# Altium PCB Ver4(AD).PcbDoc
Units mil, origin at the board's own origin, x right, y up, seen from the top; angles counter-clockwise.
Board outline 1574.8 x 1574.8 mil, 2 copper layers (Top Layer, Bottom Layer); 33 components, 29 nets, 198 pads, 51 vias.
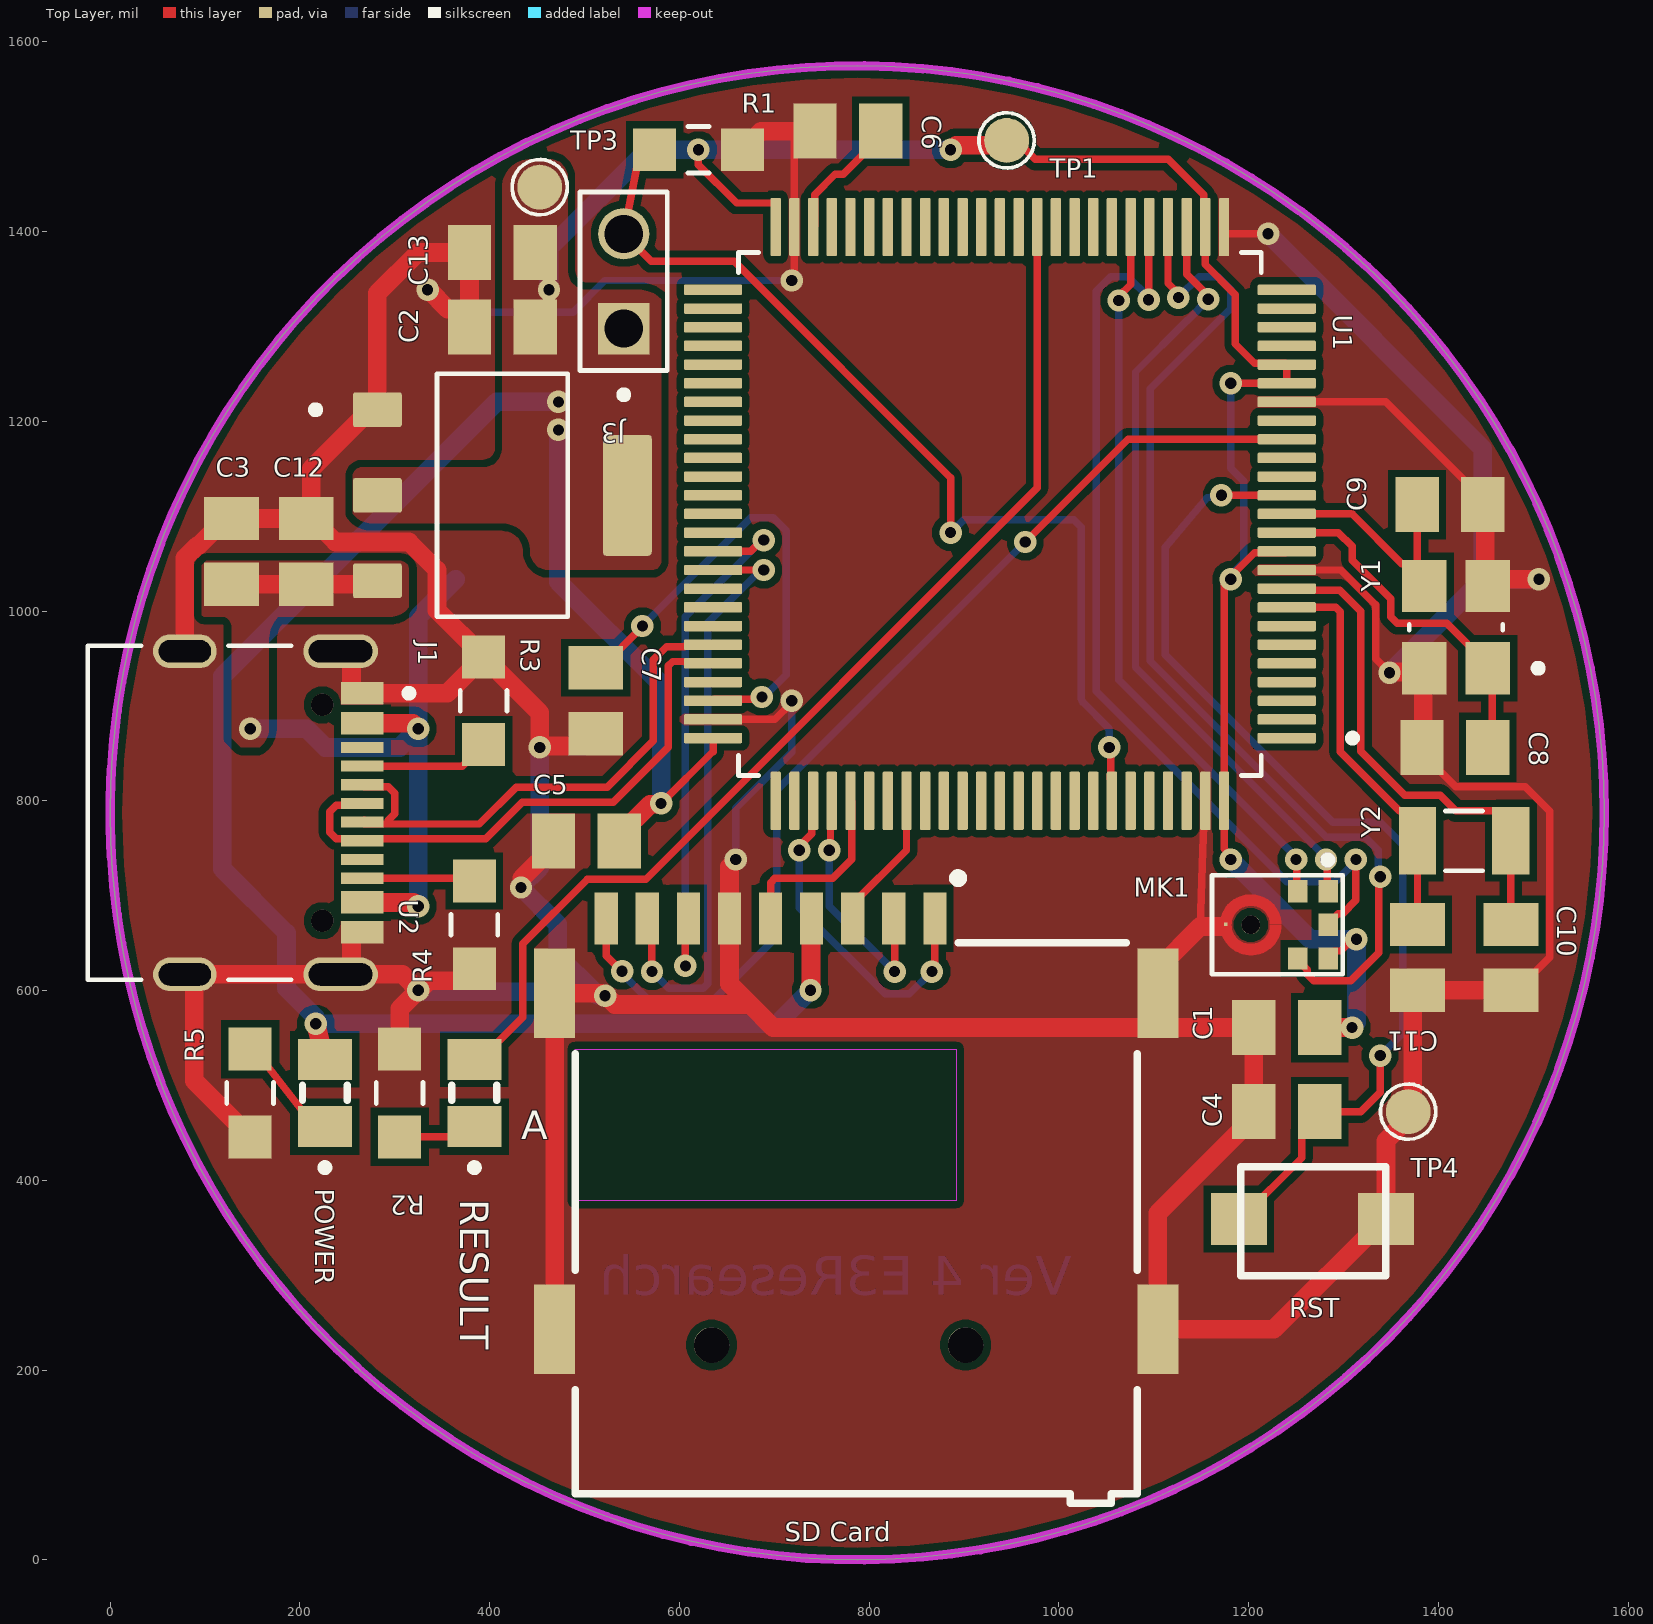
[diagram p0: Top Layer view]
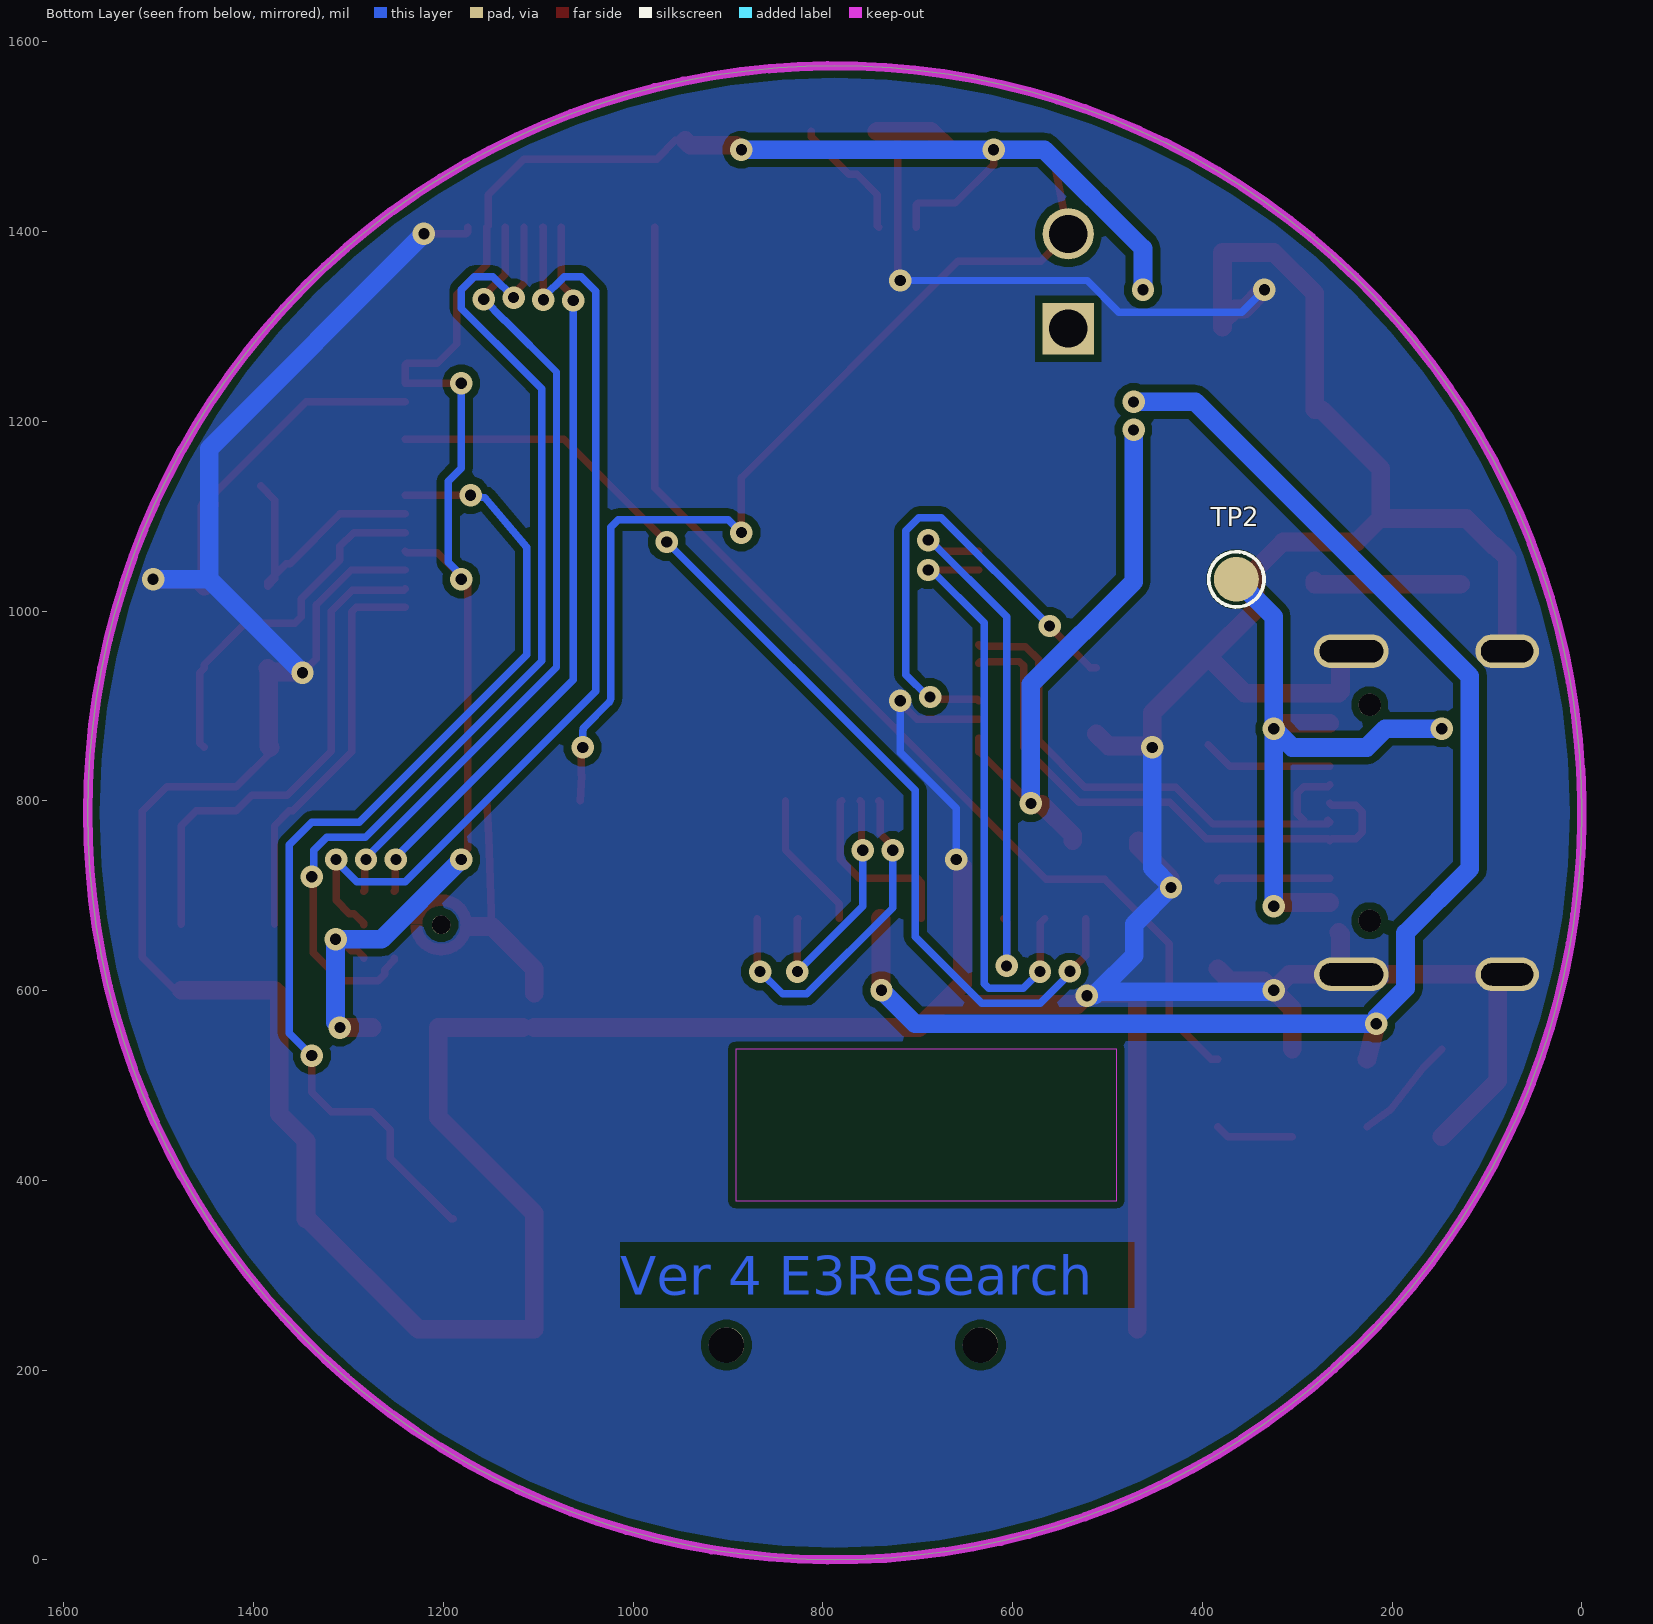
[diagram p1: Bottom Layer view, seen from below]
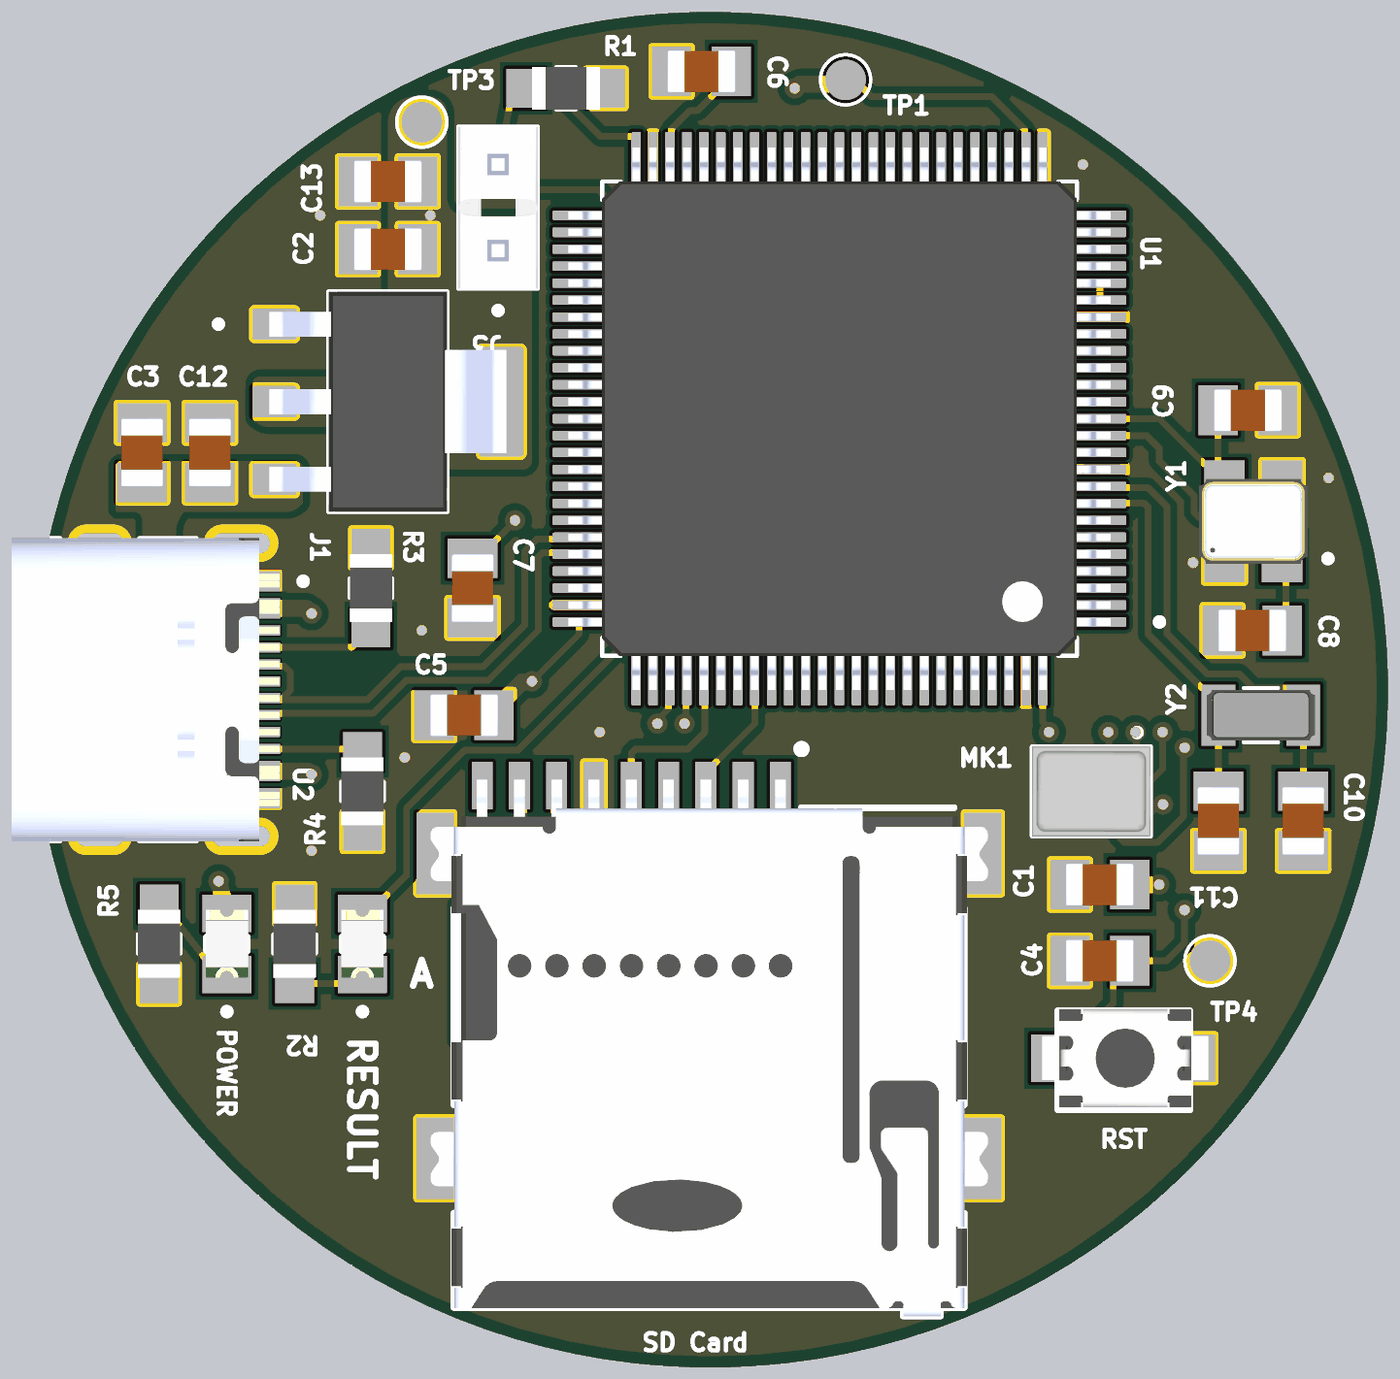
[diagram p2: 3D render of the assembled board from above, using the file's embedded part models]

## Layer stack, top to bottom
Top Solder: solder mask 0.4, Solder Resist, Dk 3.5
Top Layer: signal copper 1.4
Dielectric 1: dielectric 12.6, FR-4, Dk 4.8
Bottom Layer: signal copper 1.4
Bottom Solder: solder mask 0.4, Solder Resist, Dk 3.5

## Board outline
787.4,0 cw(c787.4,787.4) 0,787.4 cw(c787.4,787.4) 787.4,1574.8 cw(c787.4,787.4) 1574.8,787.4 cw(c787.4,787.4)

## Design rules (kind name [scope] priority, off if disabled: settings)
Clearance Clearance_1 [All] p1: gap=7.87 ignorepadtopadclearanceinfootprint=FALSE except(0: Fill-Text Poly-Text Region-Text)
Clearance Test [IsBold] p2: gap=0 ignorepadtopadclearanceinfootprint=TRUE
DiffPairsRouting [All] p1: maxlimit=10 minlimit=7.87 mostfreqgap=7.87 toplayer_minwidth=7.87 toplayer_maxwidth=7.87 toplayer_prefwidth=7.87 bottomlayer_minwidth=7.87 bottomlayer_maxwidth=7.87 bottomlayer_prefwidth=7.87 maxuncoupledlength=500
PolygonConnect [All] p1: connectstyle=Direct reliefconductorwidth=10 reliefentries=4 polygonreliefangle="90 Angle" airgapwidth=10
RoutingVias [All] p1: holewidth=11.81 width=23.62 viastyle="Through Hole" minholewidth=11.81 minwidth=23.62 maxholewidth=11.81 maxwidth=23.62
SMDNeckDown UI [IsPad and IsComponentPad and InComponent('U1')] p1: percent=80.000
SolderMaskExpansion Via [IsVia] p1: expansion=4 istentingtop=TRUE
SolderMaskExpansion SolderMaskExpansion_1 [All] p2: expansion=4 istentingtop=FALSE
SupplyNets "Schematic Supply Nets_2" [InNet('GND')] p1: voltage=0.000
SupplyNets "Schematic Supply Nets_1" [InNet('+3.3V')] p2: voltage=0.000
SupplyNets "Schematic Supply Nets" [InNet('+5V')] p3: voltage=0.000
Width Width_Power [InNet('GND') or InNet('+5V') or InNet('+3.3V') or InNet('VBUS')] p1: maxlimit=19.68 minlimit=7.87 preferedwidth=7.87
Width [All] p2: maxlimit=7.87 minlimit=7.87 preferedwidth=7.87
29 further rules are at their usual default settings.

## Classes and differential pairs
differential pair USB: +USB_P -USB_N

## Components (designator, comment, footprint, x,y, rotation, side; value= is the part's Value field where it differs from the comment)
C1 "0.1uF" CAPC2012X94N 1240.16,561.02 r180 top
C2 "10 µF" CAPC2012X94N 413.39,1377.95 r180 top
C3 "10 µF" CAPC2012X94N 127.95,1062.99 r90 top
C4 "0.1 µF" CAPC2012X94N 1240.16,472.44 r180 top
C5 "0.1uF" CAPC2012X94N 501.97,757.87 r180 top
C6 "2.2uF" CAPC2012X94N 777.56,1505.91 r0 top
C7 "2.2uF" CAPC2012X94N 511.81,905.51 r90 top
C8 "12pF" CAPC2012X94N 1417.32,856.3 r180 top
C9 "12pF" CAPC2012X94N 1412.2,1112.2 r0 top
C10 "12.5pF" CAPC2012X94N 1476.38,635.04 r270 top
C11 "12.5pF" CAPC2012X94N 1377.95,635.04 r270 top
C12 "0.1 µF" CAPC2012X94N 206.69,1062.99 r90 top
C13 "0.1 µF" CAPC2012X94N 413.39,1299.21 r180 top
J1 "TYPE-C-31-M-12" HRO_TYPE-C-31-M-12 78.74,787.4 r270 top locked
J3 "3-644456-2" TE_3-644456-2 541.34,1297.64 r90 top
MK1 "ICS-43434" MIC_ICS-43434 1230.31,669.29 r270 top locked
POWER "597-5411-407F" LEDC2012X70N 226.38,492.13 r90 top
R1 "10k" RES_ERJU06J203V 620.08,1486.22 r180 top
R2 "1K" RES_ERJU06J203V 305.12,492.13 r270 top
R3 "5.1k" RES_ERJU06J203V 393.7,905.51 r90 top
R4 "5.1k" RES_ERJU06J203V 383.86,669.29 r270 top
R5 "1K" RES_ERJU06J203V 147.64,492.13 r90 top
RESULT "597-5411-407F" LEDC2012X70N 383.86,492.13 r90 top
RST "Button" Button2PSMD 1269.68,354.33 r0 top
"SD Card" "MEM2075-00-140-01-A" GCT_MEM2075-00-140-01-A 767.72,226.38 r0 top locked
TP1 "Test point" PCBComponent_1 944.88,1496.06 r0 top
TP2 "Test point" PCBComponent_1 364.17,1033.46 r90 bottom
TP3 "Test point" PCBComponent_1 452.76,1446.85 r90 top
TP4 "Test point" PCBComponent_1 1368.11,472.44 r90 top
U1 "STM32H743VIT6" QFP50P1600X1600X160-100N 937.8,1102.36 r180 top locked
U2 "AMS1117-3.3" SOT229P700X180-4N 413.39,1122.05 r0 top
Y1 "26MHz" XTAL_C3E-24.000-12-3030-R 1418.51,983.07 r180 top
Y2 "32.7680K" XTAL_FC-135_32.7680KA-A0 1427.17,757.87 r180 top

## Footprints (in the part's own frame and the unit in brackets; to place one, negate y for a bottom-side part, rotate by r counter-clockwise, add the part's x,y. Pads: shape width x height; smd on the part's side, far side on the other; paste and mask are expansions set on the pad)
Button2PSMD [mm]
  rect 1.5x1.4 smd: 2(-2.032,0.127) 3(1.905,0.127)
  silkscreen extent -1.99,-1.4 1.91,1.52, body extent -2.45,-1.32 2.45,1.58, height 2
CAPC2012X94N [mm]
  rect 1.16x1.47 smd: 1(-0.88,0) 2(0.88,0)
  body extent -1,-0.63 1,0.63, height 0.94
GCT_MEM2075-00-140-01-A [mm]
  rect 0.62x1.4 smd: P1(2.58,11.42) P2(1.48,11.42) P3(0.38,11.42) P4(-0.72,11.42) P5(-1.82,11.42) P6(-2.92,11.42) P7(-4.02,11.42) P8(-5.12,11.42) P9(-6.22,11.42)
  rect 1.1x2.4 smd: SH1(-7.6,0.42) SH2(-7.6,9.42) SH3(8.55,9.42) SH4(8.55,0.42)
  round 0.95 hole 0.95 unplated: ""(-3.4,0) ""(3.4,0)
  Keep-Out Layer region: 3.15,3.87 -7.05,3.87 -7.05,7.92 3.15,7.92
  silkscreen extent -7.05,-4.23 8,12.62, body extent -7.74,-4.25 8.7,11.6, height 1.45
HRO_TYPE-C-31-M-12 [mm]
  rect 0.6x1.14 smd mask+0.05: A1_B12(-3.2,4.75) A4_B9(-2.4,4.75) B1_A12(3.2,4.75) B4_A9(2.4,4.75)
  rect 0.3x1.14 smd mask+0.05: A5(-1.25,4.75) A6(-0.25,4.75) A7(0.25,4.75) A8(1.25,4.75) B5(1.75,4.75) B6(0.75,4.75) B7(-0.75,4.75) B8(-1.75,4.75)
  oval 0.9x2 hole 0.6 slot 1.7 at 90 deg: S1(-4.325,4.17) S2(4.325,4.17)
  oval 0.9x1.7 hole 0.6 slot 1.4 at 90 deg: S3(-4.325,0) S4(4.325,0)
  round 0.6 hole 0.6 unplated: ""(-2.89,3.68) ""(2.89,3.68)
  silkscreen extent -4.47,-2.6 4.47,6.1, body extent -4.47,-2.6 4.47,5.31, height 3.31
LEDC2012X70N [mm]
  rect 1.1x1.45 smd: A(0.9,0) C(-0.9,0)
  silkscreen extent -2.1,-0.6 0.2,0.6, body extent -1,-0.63 1,0.63, height 0.7
MIC_ICS-43434 [mm]
  rect 0.6x0.522 smd paste-0.05: 1(-0.9,1.361) 2(-0.9,0.539) 4(0.9,0.539) 5(0.9,1.361) 6(0,1.361)
  rect 0.1x0.1 smd paste-1 mask+0: 3(-0.015,-1.383)
  round 0.5 hole 0.5 unplated mask+0.665: ""(0,-0.713)
  Top Layer region: 250 vertices and 0 holes, not listed, extent -0.81,-1.53 0.81,0.1
  silkscreen extent -1.84,-1.75 1.33,1.75, body extent -1.33,-1.75 1.33,1.75, height 0.98
PCBComponent_1 [mm]
  round 1.2 smd paste+0: TP?(0,0)
  silkscreen extent -0.74,-0.74 0.74,0.74, body extent -0.6,-0.6 0.6,0.6, height 0.03
QFP50P1600X1600X160-100N [mm]
  rrect25% 1.56x0.28 smd: 1(-7.68,6) 2(-7.68,5.5) 3(-7.68,5) 4(-7.68,4.5) 5(-7.68,4) 6(-7.68,3.5) 7(-7.68,3) 8(-7.68,2.5) 9(-7.68,2) 10(-7.68,1.5) 11(-7.68,1) 12(-7.68,0.5) 13(-7.68,0) 14(-7.68,-0.5) 15(-7.68,-1) 16(-7.68,-1.5) 17(-7.68,-2) 18(-7.68,-2.5) 19(-7.68,-3) 20(-7.68,-3.5) 21(-7.68,-4) 22(-7.68,-4.5) 23(-7.68,-5) 24(-7.68,-5.5) 25(-7.68,-6) 51(7.68,-6) 52(7.68,-5.5) 53(7.68,-5) 54(7.68,-4.5) 55(7.68,-4) 56(7.68,-3.5) 57(7.68,-3) 58(7.68,-2.5) 59(7.68,-2) 60(7.68,-1.5) 61(7.68,-1) 62(7.68,-0.5) 63(7.68,0) 64(7.68,0.5) 65(7.68,1) 66(7.68,1.5) 67(7.68,2) 68(7.68,2.5) 69(7.68,3) 70(7.68,3.5) 71(7.68,4) 72(7.68,4.5) 73(7.68,5) 74(7.68,5.5) 75(7.68,6)
  rrect25% 0.28x1.56 smd: 26(-6,-7.68) 27(-5.5,-7.68) 28(-5,-7.68) 29(-4.5,-7.68) 30(-4,-7.68) 31(-3.5,-7.68) 32(-3,-7.68) 33(-2.5,-7.68) 34(-2,-7.68) 35(-1.5,-7.68) 36(-1,-7.68) 37(-0.5,-7.68) 38(0,-7.68) 39(0.5,-7.68) 40(1,-7.68) 41(1.5,-7.68) 42(2,-7.68) 43(2.5,-7.68) 44(3,-7.68) 45(3.5,-7.68) 46(4,-7.68) 47(4.5,-7.68) 48(5,-7.68) 49(5.5,-7.68) 50(6,-7.68) 76(6,7.68) 77(5.5,7.68) 78(5,7.68) 79(4.5,7.68) 80(4,7.68) 81(3.5,7.68) 82(3,7.68) 83(2.5,7.68) 84(2,7.68) 85(1.5,7.68) 86(1,7.68) 87(0.5,7.68) 88(0,7.68) 89(-0.5,7.68) 90(-1,7.68) 91(-1.5,7.68) 92(-2,7.68) 93(-2.5,7.68) 94(-3,7.68) 95(-3.5,7.68) 96(-4,7.68) 97(-4.5,7.68) 98(-5,7.68) 99(-5.5,7.68) 100(-6,7.68)
  silkscreen extent -9.54,-7 7,7, body extent -8,-8 8,8, height 1.6
RES_ERJU06J203V [mm]
  rect 1.15x1.15 smd: 1(-1.175,0) 2(1.175,0)
  silkscreen extent -0.28,-0.63 0.28,0.63, body extent -1,-0.63 1,0.63, height 0.6
SOT229P700X180-4N [mm]
  rrect15% 1.31x0.93 smd: 1(-3.345,2.29) 2(-3.345,0) 3(-3.345,-2.29)
  rrect15% 1.31x3.24 smd: 2(3.345,0)
  silkscreen extent -5.1,-3.25 1.75,3.25, body extent -3.5,-3.25 3.5,3.25, height 1.8
TE_3-644456-2 [mm]
  rect 1.37x1.37 / inner round 1.37 / far side rect 1.37x1.37 hole 1.02: 1(0,0)
  round 1.37 hole 1.02: 2(2.54,0)
  silkscreen extent -1.87,-1.17 3.66,1.17, body extent -1.12,-1.17 3.66,1.17, height 10.03
XTAL_C3E-24.000-12-3030-R [mm]
  rect 1.2x1.4 smd: 1(-0.85,1.1) 2(-0.85,-1.1) 3(0.85,-1.1) 4(0.85,1.1)
  silkscreen extent -2.3,-0.08 1.25,1.2, body extent -1.25,-1.6 1.25,1.6, height 0.75
XTAL_FC-135_32.7680KA-A0 [mm]
  rect 1x1.8 smd: 1(-1.25,0) 2(1.25,0)
  silkscreen extent -0.5,-0.8 0.5,0.8, body extent -1.6,-0.75 1.6,0.75, height 0.9

## Part data
C1 C4 C5 C6 C7 C8 C9 C10 C11 C12 C13: library part CL10B104KB8NNNC, "CAP 0805", Package="1608-2 SAMSUNG", Check_prices=https://www.snapeda.com/parts/CL10B104KB8NNNC/Samsung/view-part/?ref=eda, MF="Samsung Electro-Mechanics", MP=CL10B104KB8NNNC, SnapEDA_Link=https://www.snapeda.com/parts/CL10B104KB8NNNC/Samsung/view-part/?ref=snap
C2 C3: library part 0805YC103J4T2A, "10uF 0805 SMD", Package="2012 AVX", Check_prices=https://www.snapeda.com/parts/0805YC103J4T2A/AVX/view-part/?ref=eda, MF=AVX, MP=0805YC103J4T2A, SnapEDA_Link=https://www.snapeda.com/parts/0805YC103J4T2A/AVX/view-part/?ref=snap
J1: "USB Connectors 24 Receptacle 1 8.94*7.3mm RoHS", Package=Package, Check_prices=https://www.snapeda.com/parts/TYPE-C-31-M-12/HRO+Electronics+Co.%252C+Ltd./view-part/?ref=eda, MF="HRO Electronics Co., Ltd.", MP=TYPE-C-31-M-12, SnapEDA_Link=https://www.snapeda.com/parts/TYPE-C-31-M-12/HRO+Electronics+Co.%252C+Ltd./view-part/?ref=snap
J3: "HEADER ASSEMBLY, NARROW, MTA-100, 2 POSITION, STRAIGHT", Package=None, Check_prices=https://www.snapeda.com/parts/3-644456-2/TE+Connectivity+AMP+Connectors/view-part/?ref=eda, MF="TE Connectivity", MP=3-644456-2, SnapEDA_Link=https://www.snapeda.com/parts/3-644456-2/TE+Connectivity+AMP+Connectors/view-part/?ref=snap
MK1: "60 Hz ~ 20 kHz Digital, IÂ²S Microphone MEMS (Silicon) 1.65 V ~ 3.63 V Omnidirectional (-26 Â±1dB @ 94dB SPL) Solder Pads", Package="Custom Package TDK InvenSense", Availability="In Stock", Check_prices=https://www.snapeda.com/parts/ICS-43434/TDK+InvenSense/view-part/?ref=eda, MF="TDK InvenSense", MP=ICS-43434, Price=None, Purchase-URL=https://pricing.snapeda.com/search/part/ICS-43434/?ref=eda, SnapEDA_Link=https://www.snapeda.com/parts/ICS-43434/TDK+InvenSense/view-part/?ref=snap
POWER RESULT: "SMD LED 0805 YG 7", Package="0805 Dialight", Check_prices=https://www.snapeda.com/parts/597-5411-407F/Dialight/view-part/?ref=eda, MF=Dialight, MP=597-5411-407F, SnapEDA_Link=https://www.snapeda.com/parts/597-5411-407F/Dialight/view-part/?ref=snap
R1 R2 R3 R4 R5: library part R0805, "R0805", Package=None, Availability=Unavailable, MP=ERJU06J203V, Price=None
RST: library part Component_1
"SD Card": "9 (8 + 1) Position Card Connector microSD Surface Mount, Right Angle Gold", Package=None, Check_prices=https://www.snapeda.com/parts/MEM2075-00-140-01-A/Global+Connector+Technology/view-part/?ref=eda, MF="Global Connector Technology", MP=MEM2075-00-140-01-A, SnapEDA_Link=https://www.snapeda.com/parts/MEM2075-00-140-01-A/Global+Connector+Technology/view-part/?ref=snap
TP1 TP2 TP3 TP4: library part Test_Point
U1: "ARMÂ® CortexÂ®-M7 STM32H7 Microcontroller IC 32-Bit Single-Core 480MHz 2MB (2M x 8) FLASH 100-LQFP (14x14)", Package="LQFP-100 STMicroelectronics", Check_prices=https://www.snapeda.com/parts/STM32H743VIT6/STMicroelectronics/view-part/?ref=eda, MF=STMicroelectronics, MP=STM32H743VIT6, SnapEDA_Link=https://www.snapeda.com/parts/STM32H743VIT6/STMicroelectronics/view-part/?ref=snap
U2: "Sot223/Pkg 1-Amp 3.3-Volt Low Drop Out Voltage Regulatator", Package="SOT-223 Seeed Technology", Check_prices=https://www.snapeda.com/parts/AMS1117-3.3/Advanced+Monolithic+Systems/view-part/?ref=eda, MF="Advanced Monolithic Systems", MP=AMS1117-3.3, SnapEDA_Link=https://www.snapeda.com/parts/AMS1117-3.3/Advanced+Monolithic+Systems/view-part/?ref=snap
Y1: library part C3E-24.000-12-3030-R, "3225SMD", Package=None, Availability=Unavailable, MP=C3E-24.000-12-3030-R, Price=None
Y2: library part FC-135_32.7680KA-A0, "32.768 kHz Â±20ppm Crystal 12.5pF 70 kOhms 2-SMD, No Lead / 3215SMD", Package="SMD-2 Epson", Check_prices=https://www.snapeda.com/parts/FC-135%2032.7680KA-A0/EPSON/view-part/?ref=eda, MF=EPSON, MP="FC-135 32.7680KA-A0", SnapEDA_Link=https://www.snapeda.com/parts/FC-135%2032.7680KA-A0/EPSON/view-part/?ref=snap

## Via types
v1: diameter 23.62, hole 11.81, Top Layer to Bottom Layer, tented both sides, 51 vias

## Nets (pads, with @x,y where several pads share a name; then routed paths per layer and width w, separated by ;. In a path a pad name is that pad's centre, name@x,y a point inside that pad or via, vN(x,y) a via of type N, cw(c..) or ccw(c..) an arc to the next point about the centre after c; other vN are vias at no path point)
+3.3V: "SD Card.P4" C1.1 C2.1 C5.1 C13.1 J3.1 MK1.5 POWER.A TP1.TP? TP3.TP? U1.11 U1.20 U1.21 U1.27 U1.50 U1.75 U1.100 U2.2 | length 4309.8
  Top Layer w7.87: v1(580.71,797.24) 635.43,851.97 U1.75 ; v1(620.08,1486.22) 620.08,1470.5 660.46,1430.12 700,1430.12 701.58,1428.54 U1.50 ; TP1.TP? 955.53,1496.06 975.22,1476.38 1115.11,1476.38 1152.76,1438.73 1152.76,1406.3 U1.27 1154.33,1365.3 1186.08,1333.55 1186.08,1281.49 1206.15,1261.42 1238.58,1261.42 U1.21 U1.20 v1(1181.1,1240.16) ; v1(1181.1,738.19) 1181.1,742.45 1174.02,749.54 1174.02,1029.28 1206.15,1061.42 1238.58,1061.42 U1.11 ; MK1.5 1283.9,635.39 1290.24,641.73 1296.85,641.73 1309.32,654.2 v1(1313.58,654.2)
  Top Layer w19.68: v1(216.75,565.01) POWER.A ; C5.1 536.62,763.98 569.13,796.49 579.96,796.49 v1(580.71,797.24) ; v1(738.19,600.39) 738.78,600.98 738.78,675.4 739.37,675.99 ; v1(885.83,1486.22) 886.89,1486.22 891.73,1491.06 939.88,1491.06 TP1.TP? ; C1.1 v1(1309.06,561.02)
  Bottom Layer w7.87: v1(1181.1,1033.46) 1181.1,1037.73 1194.88,1051.51 1194.88,1136.81 1181.1,1150.59 v1(1181.1,1240.16)
  Bottom Layer w19.68: v1(462.6,1338.58) 462.6,1382.09 566.73,1486.22 v1(620.08,1486.22) v1(885.83,1486.22) ; v1(472.44,1190.94) 472.44,1031.08 580.71,922.81 v1(580.71,797.24) ; v1(472.44,1220.47) 407.39,1220.47 118.11,931.19 118.11,728.35 185.83,660.63 185.83,602.45 216,572.27 216,565.76 v1(216.75,565.01) 702.81,565.01 v1(738.19,600.39) ; v1(1181.1,738.19) 1265.09,654.2 v1(1313.58,654.2) 1313.58,566.62 1309.06,562.09 v1(1309.06,561.02)
+5V: C3.1 C12.1 J1.A4_B9 J1.B4_A9 TP2.TP? U2.3 | length 833.7
  Top Layer w19.68: C3.1 281.69,1028.35 U2.3 ; J1.B4_A9 319.8,692.91 323.74,688.98 v1(324.8,688.98) ; J1.A4_B9 318.9,881.89 v1(324.8,875.98)
  Bottom Layer w19.68: v1(147.64,875.98) 207.06,875.98 226.75,856.3 305.12,856.3 v1(324.8,875.98) ; v1(324.8,688.98) v1(324.8,875.98) ; TP2.TP? 324.8,994.1 v1(324.8,875.98)
BOOT0: J3.2 R1.2 U1.94 | length 1054.1
  Top Layer w7.87: R1.2 555.12,1467.52 J3.2 570.47,1368.5 657.63,1368.5 885.83,1140.31 v1(885.83,1082.68) ; v1(1053.15,856.3) 1054.53,854.92 1054.53,826.77 1054.33,826.77 U1.94
  Bottom Layer w7.87: v1(885.83,1082.68) 899.61,1096.46 1015.75,1096.46 1023.62,1088.58 1023.62,908.77 ccw(c1031.5,908.77) 1024.03,906.28 ccw(c1031.5,908.77) 1025.91,903.22 1050.87,878.26 cw(c1045.28,872.72) 1053.15,872.72 v1(1053.15,856.3)
GND: "SD Card.P6" "SD Card.SH1" "SD Card.SH2" "SD Card.SH3" "SD Card.SH4" C1.2 C2.2 C3.2 C4.2 C5.2 C6.1 C7.1 C8.2 C9.2 C10.2 C11.2 C12.2 C13.2 J1.A1_B12 J1.B1_A12 J1.S1 J1.S2 J1.S3 J1.S4 MK1.3 R1.1 R2.1 R3.2 R4.2 R5.1 RST.3 TP4.TP? U1.10 U1.19 U1.26 U1.49 U1.74 U1.99 U2.1 Y1.2 Y1.4 | length 7884
  Top Layer w7.87: U1.74 700.73,885.83 718.5,903.6 v1(718.5,905.51) ; v1(718.5,1348.43) 721.26,1351.18 C6.1@721.26,1505.91 ; 1149.14,667.64 1151.57,748 cw(c1159.44,747.73) 1151.58,748.06 ; 1151.58,748.1 U1.99@1152.76,773.23 ; U1.26 1174.02,1399.21 1175.59,1397.64 v1(1220.47,1397.64) ; U1.10 1296.99,1043.31 1333.86,1006.44 1333.86,949.6 v1(1348.43,935.04) ; U1.19 1344.68,1220.47 1446.85,1118.31 C9.2 ; C8.2 1382.68,850.2 1418.12,814.75 1491.32,814.75 1517.13,788.95 1517.13,635.04 1482.48,600.39 C10.2 ; U1.99@1152.76,773.23 U1.99 U1.99@1152.76,773.23
  Top Layer w19.68: J1.S4 J1.S2@247.06,617.13 ; J1.S3 78.74,1055.96 91.68,1068.9 93.11,1068.9 121.85,1097.64 C3.2 C12.2 212.01,1102.95 212.01,1150 274.21,1212.21 U2.1 281.69,1334.84 324.8,1377.95 C2.2 C13.2 ; J1.S4@88.58,617.13 88.58,504.92 R5.1 ; C12.2@212.8,1097.64 237.6,1072.83 314.96,1072.83 344.49,1043.31 344.49,1000.98 R3.2 ; J1.S1 247.06,957.68 254.33,950.4 254.33,915.35 256.3,913.39 355.32,913.39 R3.2 ; J1.B1_A12@256.3,661.42 254.33,659.45 254.33,624.4 J1.S2@247.06,617.13 ; R2.1 305.12,580.71 v1(324.8,600.39) ; v1(334.65,1338.58) 335.71,1338.58 355.99,1318.31 365.75,1318.31 C13.2@378.74,1305.32 ; R4.2 371.06,610.24 335.71,610.24 325.87,600.39 v1(324.8,600.39) ; v1(433.07,708.66) 433.82,709.41 433.82,718.27 467.32,751.77 C5.2 ; 468.5,242.91 468.5,597.24 517.88,597.24 520.59,594.54 v1(521.65,594.54) ; C7.1 498.82,857.87 455.4,857.87 453.82,856.3 v1(452.76,856.3) 452.76,892.72 R3.2 ; v1@520.37,593.25 520.9,593.78 523.47,593.78 531.82,585.43 674.41,585.43 ; v1(659.45,738.19) 659.45,737.12 652.76,730.43 652.76,607.09 674.41,585.43 ; R1.1 686.02,1505.91 721.26,1505.91 C6.1 ; 1104.33,561.02 698.82,561.02 674.41,585.43 ; 1104.33,597.24 1104.33,622.83 1149.14,667.64 1170.12,667.64 ; 1116.14,561.02 C1.2 C4.2@1205.51,466.34 ; C4.2 C4.2@1205.51,466.34 ; v1(1348.43,935.04) 1349.18,935.79 1381.07,935.79 Y1.4 ; C8.2 1383.86,857.48 Y1.4@1383.86,938.58 ; C9.2 1449.41,1109.65 1449.41,1028.94 Y1.2 1459.06,1033.46 v1(1505.91,1033.46) ; C10.2 C11.2 1373.03,595.47 1373.03,469.9 1344.69,441.56 RST.3 1342.72,359.33 1226.3,242.91 1104.33,242.91 1104.33,365.16 C4.2@1205.51,466.34 ; J1.S2@247.06,617.13 254.33,617.13 308.07,617.13 v1(324.8,600.39)
  Bottom Layer w7.87: v1(334.65,1338.58) 358.27,1314.96 488.02,1314.96 521.49,1348.43 v1(718.5,1348.43) ; v1(659.45,738.19) 659.45,792.32 718.5,851.38 v1(718.5,905.51)
  Bottom Layer w19.68: v1(324.8,600.39) 325.56,599.64 328.34,599.64 329.28,598.7 510.17,598.7 ; v1(452.76,856.3) 452.76,729.41 433.07,709.73 v1(433.07,708.66) 471.81,669.92 471.81,637.07 510.17,598.7 ; v1(521.65,594.54) 520.9,595.29 513.58,595.29 510.17,598.7 ; v1(1220.47,1397.64) 1446.85,1171.26 1446.85,1033.46 ; v1(1348.43,935.04) 1446.85,1033.46 ; v1(1505.91,1033.46) 1446.85,1033.46
LedResult: RESULT.A U1.36 | length 1163
  Top Layer w7.87: RESULT.A 390.75,527.56 435.04,571.85 435.04,649.38 502.78,717.13 564.34,717.13 977.17,1129.95 U1.36
LR: MK1.2 U1.31 | length 783.3
  Top Layer w7.87: v1(1062.99,1327.38) 1062.99,1331.64 1075.59,1344.24 U1.31 ; v1(1250,738.19) 1250.77,737.42 1250.77,705.49 MK1.2
  Bottom Layer w7.87: v1(1062.99,1327.38) 1062.99,927.62 1250,740.62 v1(1250,738.19)
NetC4_1: C4.1 RST.2 U1.14 | length 1091.3
  Top Layer w7.87: v1(1171.26,1122.05) U1.14 ; RST.2 1191.65,359.33 1255.91,423.58 1255.91,453.54 C4.1 1318,472.44 1338.58,493.02 v1(1338.58,531.5)
  Bottom Layer w7.87: v1(1171.26,1122.05) 1156.29,1119.55 1112.2,1067.51 1112.2,953.93 1288.58,777.56 1338.58,777.56 1362.35,753.79 1362.35,555.27 v1(1338.58,531.5)
NetPOWER_C: POWER.C R5.2 | length 114.3
  Top Layer w7.87: R5.2 166.34,519.68 201.77,474.41 POWER.C
NetR2_2: R2.2 RESULT.C | length 83.2
  Top Layer w7.87: R2.2 373.03,445.87 RESULT.C
PC15-OSC32-IN: C11.1 U1.8 Y2.2 | length 423.6
  Top Layer w7.87: U1.8 1291.82,1003.94 1296.43,999.32 1296.43,851.8 1358.86,789.37 1362.21,789.37 1377.95,773.62 Y2.2 C11.1
PC15-OSC32-OUT: C10.1 U1.9 Y2.1 | length 530.1
  Top Layer w7.87: U1.9 1241.73,1022.05 1295.98,1022.05 1318.11,999.91 1318.11,852.39 1364.58,805.92 1401.73,805.92 1418.28,789.37 1460.63,789.37 1476.38,773.62 Y2.1 C10.1
PH0-OSC-IN: C8.1 U1.12 Y1.1 | length 380.4
  Top Layer w7.87: U1.12 1294.6,1082.68 1309.06,1068.22 1309.06,1053.51 1349.61,1012.96 1349.61,993.93 1356.53,987.01 1408.66,987.01 1451.97,943.7 Y1.1 1456.58,935.15 1456.58,860.91 C8.1
PH1-OSC_OUT: C9.1 U1.13 Y1.3 | length 293.5
  Top Layer w7.87: U1.13 1309.06,1102.36 1361.42,1050 1365.36,1050 1385.04,1030.31 Y1.3 1377.56,1033.86 C9.1 1377.56,1116.93 C9.1@1392.52,1131.89
SCK: MK1.4 U1.29 | length 1119.2
  Top Layer w7.87: U1.29 1114.96,1345.55 1125.89,1334.62 v1(1125.89,1330.36) ; MK1.4 1251.54,632.32 1261.81,622.05 1261.81,617.16 1268.73,610.24 1307.62,610.24 1337.21,639.82 1337.21,718.51 v1(1338.73,720.04)
  Bottom Layer w7.87: v1(1125.89,1330.36) 1125.89,1330.56 1147.7,1352.36 1167.32,1352.36 1181.1,1338.58 1181.1,1318.96 1109.56,1247.41 1096.46,1234.31 1096.46,947.41 1282.06,761.81 1322.78,761.81 1336.61,747.97 1336.61,722.15 v1(1338.73,720.04)
SDI: MK1.6 U1.30 | length 1023.3
  Top Layer w7.87: v1(1094.48,1328.06) 1094.88,1328.46 1094.88,1404.33 U1.30 ; MK1.6 1283.9,670.83 1294.17,681.1 1299.06,681.1 1312.99,695.03 v1(1312.99,738.19)
  Bottom Layer w7.87: v1(1094.48,1328.06) 1094.48,1330.66 1072.78,1352.36 1054.57,1352.36 1039.37,1337.16 1039.37,915.41 1240.22,714.57 1291.28,714.57 1312.99,736.28 v1(1312.99,738.19)
SDIO_CLK: "SD Card.P5" U1.80 | length 195.7
  Top Layer w7.87: 696.06,675.99 696.06,713.89 700.68,718.5 761.75,718.5 781.5,738.25 781.5,798.82 U1.80
SDIO_CMD: "SD Card.P3" U1.83 | length 147.5
  Top Layer w7.87: 782.68,675.99 782.68,691.34 839.37,748.03 U1.83
SDIO_D0: "SD Card.P7" U1.65 | length 593.8
  Top Layer w7.87: v1(606.3,626.03) 606.3,672.84 609.45,675.99 ; U1.65 675.25,1062.99 687.07,1074.8 v1(688.98,1074.8)
  Bottom Layer w7.87: v1(606.3,626.03) 606.3,994.04 687.07,1074.8 v1(688.98,1074.8)
SDIO_D1: "SD Card.P8" U1.66 | length 642.2
  Top Layer w7.87: 566.14,675.99 571.1,671.03 v1(571.1,620.08) ; U1.66 v1(688.98,1043.31)
  Bottom Layer w7.87: v1(571.1,620.08) 588.76,602.41 625.31,602.41 629.92,607.02 629.92,987.57 685.66,1043.31 v1(688.98,1043.31)
SDIO_D2: "SD Card.P1" U1.78 | length 363.3
  Top Layer w7.87: v1(726.38,748.03) 726.38,752.29 739.37,765.29 739.37,798.42 U1.78 ; v1(866.14,620.08) 869.29,623.23 869.29,675.99
  Bottom Layer w7.87: v1(726.38,748.03) 726.38,687.07 816.99,596.46 842.52,596.46 v1(866.14,620.08)
SDIO_D3: "SD Card.P2" U1.79 | length 265.8
  Top Layer w7.87: v1(757.87,748.03) 759.25,749.41 759.25,798.62 U1.79 ; 825.99,675.99 826.77,675.2 v1(826.77,620.08)
  Bottom Layer w7.87: v1(757.87,748.03) 757.87,688.98 v1(826.77,620.08)
SDIO_NCD: "SD Card.P9" U1.17 | length 1115.1
  Top Layer w7.87: 522.84,675.99 522.84,636.95 539.37,620.42 v1(539.61,620.42) ; v1(964.57,1072.83) 1072.84,1181.1 U1.17
  Bottom Layer w7.87: v1(539.61,620.42) 539.61,617.93 570.87,586.66 632.5,586.66 702.76,656.92 702.76,811.02 v1(964.57,1072.83)
USB_CC1: J1.A5 R3.1 | length 137.3
  Top Layer w7.87: J1.A5 371.07,836.62 R3.1
USB_CC2: J1.B5 R4.1 | length 119.3
  Top Layer w7.87: J1.B5 380.91,718.5 R4.1
USB_N: J1.A7 J1.B7 U1.70 | length 571
  Top Layer w7.87: J1.B7 267.72,814.96 293.08,814.96 300,808.04 300,786.45 293.08,779.53 ; J1.A7@267.71,779.53 J1.A7 267.72,775.59 288.19,775.59 389.24,775.59 428.02,814.37 523.79,814.37 572.55,863.13 572.55,948.76 586.39,962.6 605.12,962.6 605.51,962.99 633.86,962.99 U1.70
USB_P: J1.A6 J1.B6 U1.71 | length 596.4
  Top Layer w7.87: J1.A6 263.78,795.28 238.41,795.28 231.5,788.36 231.5,766.76 238.42,759.84 263.78,759.84 J1.B6 267.72,759.84 288.19,759.84 395.77,759.84 434.55,798.62 530.31,798.62 588.3,856.61 588.3,942.24 592.91,946.85 605.12,946.85 605.51,946.46 633.86,946.46 U1.71
VCAP1: C6.2 U1.48 | length 135.7
  Top Layer w7.87: U1.48 742.52,1406.3 742.52,1438.73 764,1460.21 772.61,1460.21 812.21,1499.8 C6.2
VCAP2: C7.2 U1.73 | length 512.8
  Top Layer w7.87: C7.2 517.91,940.16 561.02,983.27 v1(561.02,984.25) ; U1.73 637.01,907.09 684.64,907.09 v1(687.01,909.45)
  Bottom Layer w7.87: v1(561.02,984.25) 675.2,1098.43 698.76,1098.43 712.6,1084.59 712.6,933.01 689.03,909.45 v1(687.01,909.45)
WS: MK1.1 U1.28 | length 825.5
  Top Layer w7.87: U1.28 1134.65,1355.01 1157.48,1332.18 v1(1157.48,1328.74) ; v1(1281.5,738.19) 1282.7,736.99 1282.7,705.93 MK1.1
  Bottom Layer w7.87: v1(1157.48,1328.74) 1157.48,1328.54 1135.68,1306.74 1135.48,1306.74 1080.71,1251.97 1080.71,940.89 1281.5,740.1 v1(1281.5,738.19)
pads on no net: "SD Card." J1. J1.A8 J1.B8 MK1. U1.1 U1.2 U1.3 U1.4 U1.5 U1.6 U1.7 U1.15 U1.16 U1.18 U1.22 U1.23 U1.24 U1.25 U1.32 U1.33 U1.34 U1.35 U1.37 U1.38 U1.39 U1.40 U1.41 U1.42 U1.43 U1.44 U1.45 U1.46 U1.47 U1.51 U1.52 U1.53 U1.54 U1.55 U1.56 U1.57 U1.58 U1.59 U1.60 U1.61 U1.62 U1.63 U1.64 U1.67 U1.68 U1.69 U1.72 U1.76 U1.77 U1.81 U1.82 U1.84 U1.85 U1.86 U1.87 U1.88 U1.89 U1.90 U1.91 U1.92 U1.93 U1.95 U1.96 U1.97 U1.98

## Polygon pours and split planes (outlines as drawn)
GND on Top Layer "GND_L01_P020" (solid, remove dead copper, pour order 20): -206.69,1751.97 -206.69,-59.06 1958.66,-59.06 1958.66,1781.5
+5V on Top Layer "+5V_L01_P015" (solid, remove dead copper, pour order 15): 88.58,1043.31 cw(c98.43,1043.31) 98.43,1053.15 305.12,1053.15 cw(c305.12,1043.31) 314.96,1043.31 314.96,1003.94 312.08,1001.05 cw(c295.28,1017.86) 295.28,994.09 177.17,994.09 ccw(c200.93,970.33) 167.32,970.33 167.32,875.98 cw(c143.56,875.98) 160.36,859.18 157.48,856.3 137.8,856.3 127.95,866.14 127.95,984.25 ccw(c118.11,984.25) 118.11,994.09 98.43,994.09 cw(c122.19,1017.86) 88.58,1017.86
+3.3V on Top Layer "+3.3V_L01_P009" (solid, remove dead copper, pour order 9): 413.39,1446.85 cw(c442.91,1446.85) 442.91,1476.38 462.6,1476.38 cw(c462.6,1456.69) 482.28,1456.69 482.28,1358.27 ccw(c501.97,1358.27) 501.97,1338.58 556.95,1338.58 cw(c556.95,1304.98) 580.71,1328.74 580.71,1053.15 cw(c570.87,1053.15) 570.87,1043.31 462.6,1043.31 cw(c462.6,1062.99) 442.91,1062.99 ccw(c413.39,1062.99) 413.39,1092.52 275.59,1092.52 cw(c275.59,1116.28) 258.79,1099.48 255.91,1102.36 255.91,1141.73 cw(c265.75,1141.73) 265.75,1151.57 393.7,1151.57 ccw(c393.7,1171.26) 413.39,1171.26
GND on Bottom Layer "GND_L02_P018" (solid, remove dead copper, pour order 18): -177.17,1683.43 -187.01,1673.59 -187.01,-49.21 2125.98,-49.21 2125.98,1683.07

## Keep-outs
Keep-Out Layer:
  circle w9.84: c787.4,787.4 r787.4

## Other copper
Bottom Layer:
  text "Ver 4 E3Research" at 1013.78,265.75 h70

## Silkscreen, mask and mechanical layers (free items; w line width, h text height)
Top Overlay:
  text "A" at 433.23,443.07 h30

## Text inside footprints (layer, text, board x,y; h text height)
J1: Mechanical 13 "PCB EDGE" at 3.94,582.68 h24 r270